# Altium PCB Main.PcbDoc (part 2 of 2)
Units mil, origin at the board's own origin, x right, y up, seen from the top; angles counter-clockwise.
Board outline 12846.15 x 9153.85 mil, 2 copper layers (TopLayer, BottomLayer); 186 components, 153 nets, 590 pads, 304 vias.
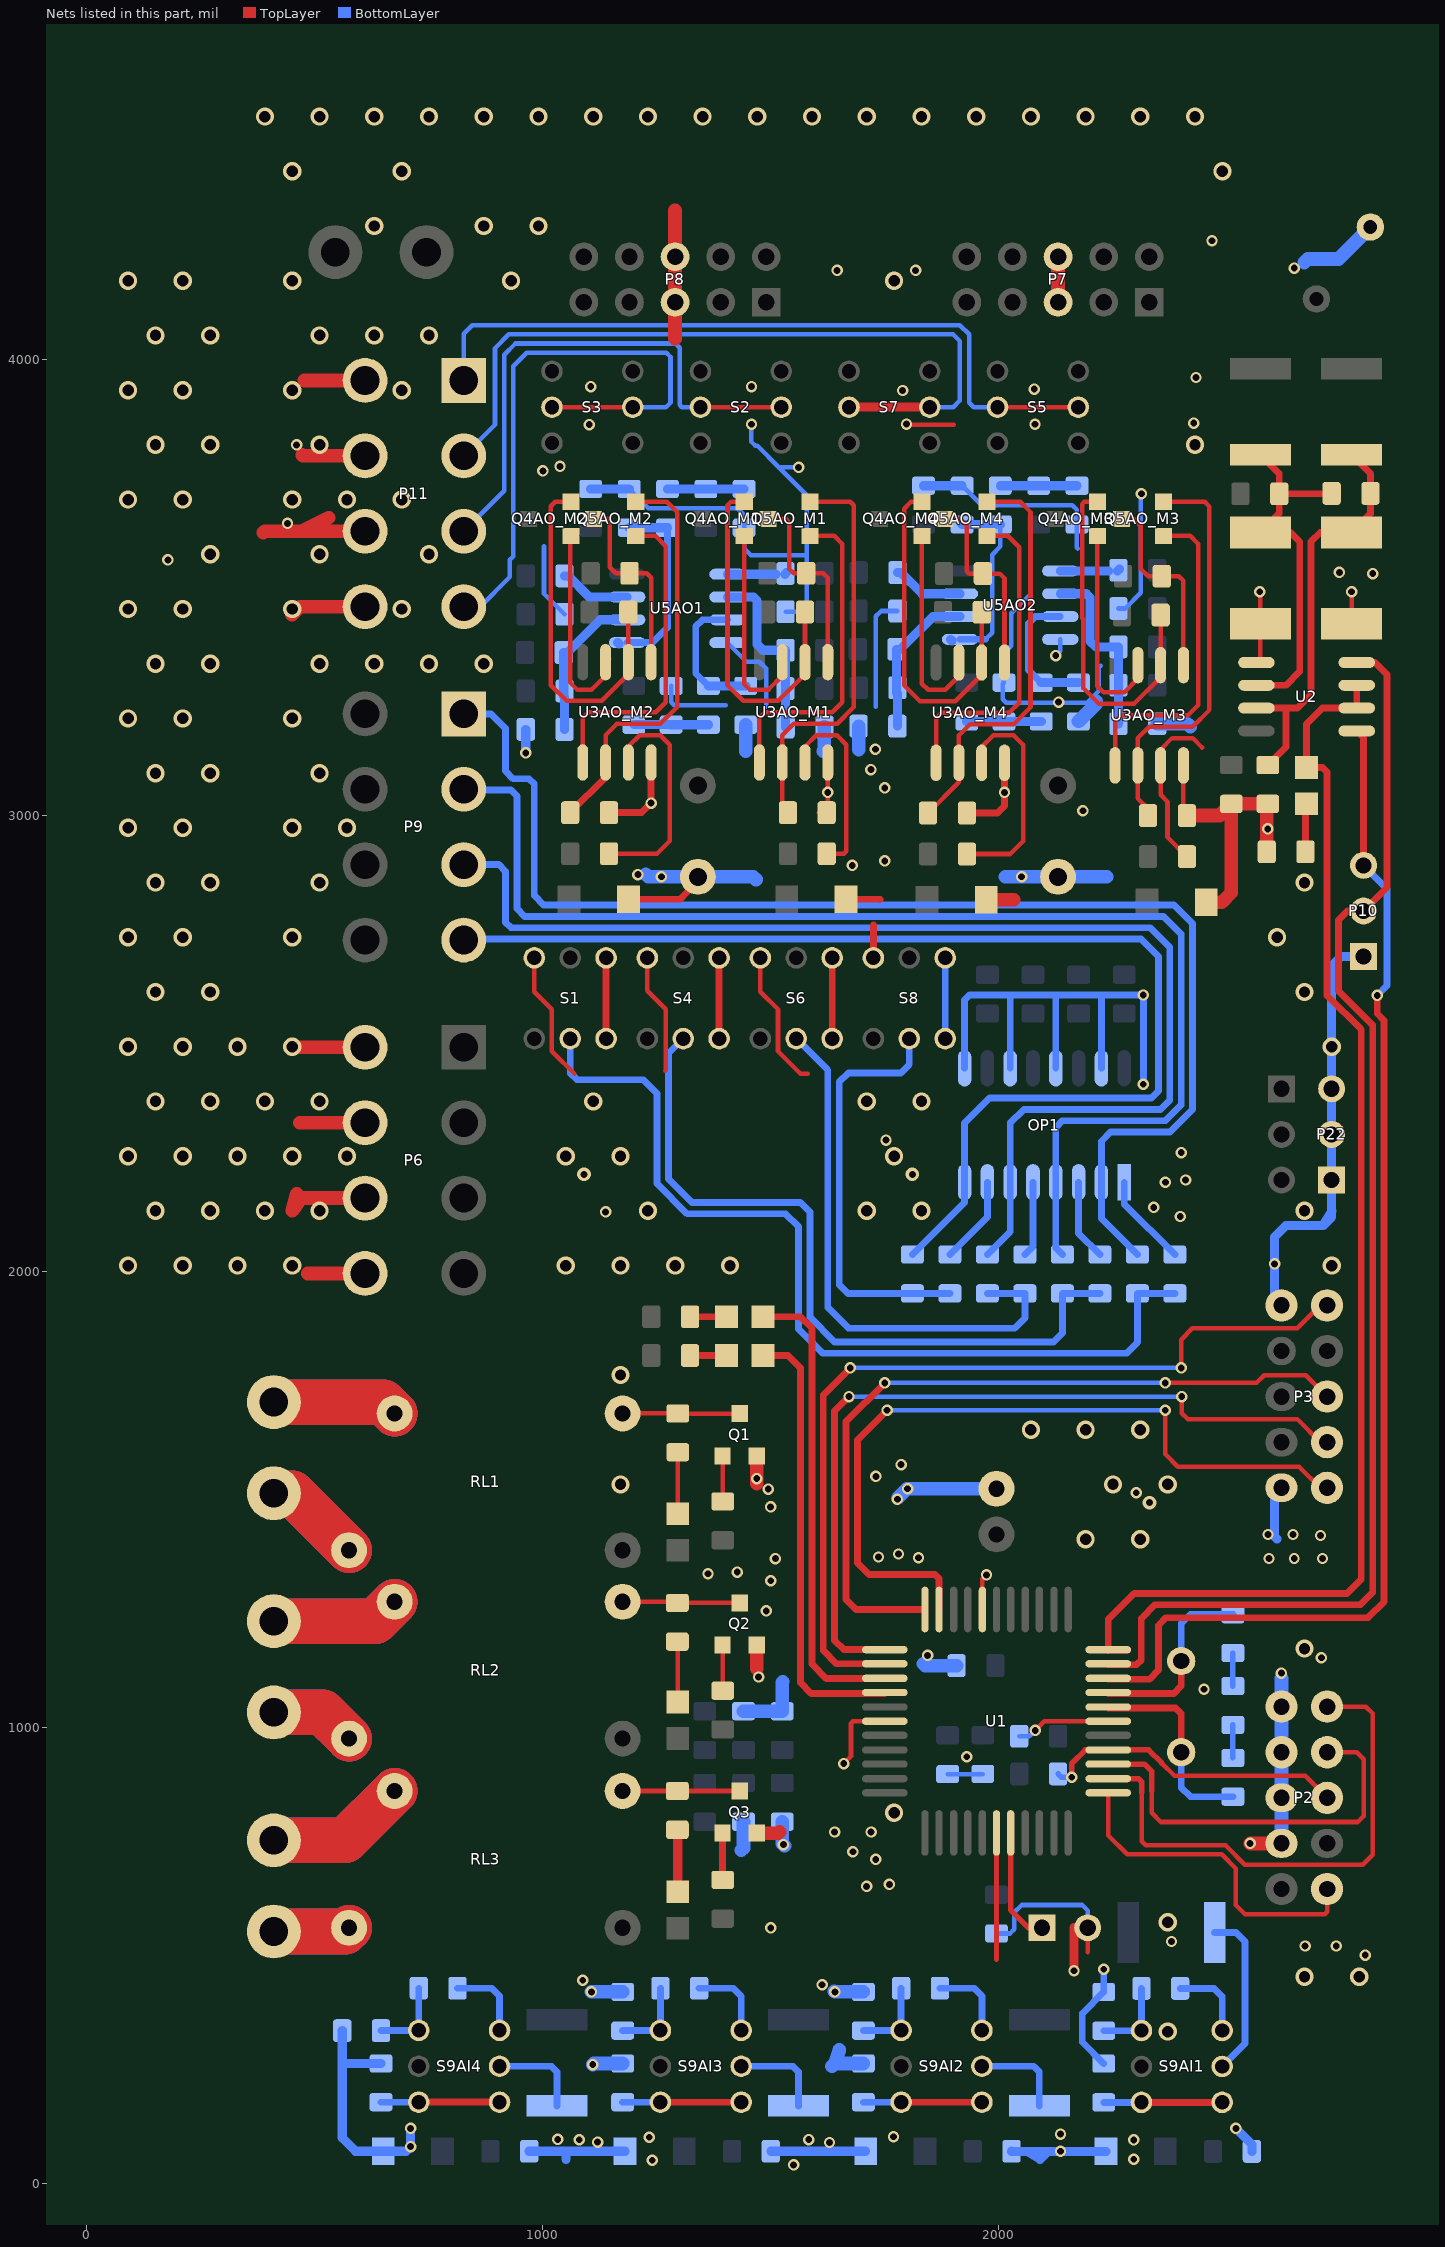
[diagram p2: the nets of this part, all layers, seen from the top]

## Via types
v1: diameter 25, hole 15, TopLayer to BottomLayer, tented both sides, 148 vias
v2: diameter 40, hole 25, TopLayer to BottomLayer, tented both sides, 133 vias
v3: diameter 30, hole 15, TopLayer to BottomLayer, tented both sides, 8 vias
v4: diameter 24, hole 15, TopLayer to BottomLayer, tented both sides, 6 vias
v5: diameter 35, hole 25, TopLayer to BottomLayer, tented both sides, 4 vias
v6: diameter 40, hole 24, TopLayer to BottomLayer, tented both sides, 3 vias
v7: diameter 30, hole 20, TopLayer to BottomLayer, tented both sides, 2 vias

## Nets (pads, with @x,y where several pads share a name; then routed paths per layer and width w, separated by ;. In a path a pad name is that pad's centre, name@x,y a point inside that pad or via, vN(x,y) a via of type N, cw(c..) or ccw(c..) an arc to the next point about the centre after c; other vN are vias at no path point) (continued)
GND: C1.2 C4.2 C5.1 C6.1 C7.1 C8.1 C9.2 C10.2 C11.2 C12AI1.2 C12AI2.2 C12AI3.2 C12AI4.2 C13AO_M1.2 C13AO_M2.2 C13AO_M3.2 C13AO_M4.2 C16AO1.1 C16AO2.1 C17AO1.2 C17AO2.2 C18AO1.1 C18AO2.1 C19AO1.1 C19AO2.1 C20AO1.2 C20AO2.2 C22AO1.2 C22AO2.2 C23AO1.2 C23AO2.2 C24AO1.2 C24AO2.2 D6.A D7.A DW1AI1.A DW1AI2.A DW1AI3.A DW1AI4.A OP1.9 OP1.11 OP1.13 OP1.15 P2.4 P2.6 P2.8 P2.10 P3.2 P3.10 P6.2 P6.4 P6.6 P6.8 P7.5 P7.6 P8.5 P8.6 P10.1 P11.2 P11.4 P11.6 P11.8 P20.2 P22.1 P22.2 P22.3 pad.0 Q1.3 Q2.3 Q3.3 R4.1 R13.1 R23.1 R27.1 R32AI1.2 R32AI2.2 R32AI3.2 R32AI4.2 R33AI1.2 R33AI2.2 R33AI3.2 R33AI4.2 R37AO_M1.1 R37AO_M2.1 R37AO_M3.1 R37AO_M4.1 R42AO1.2 R42AO2.2 R47AO1.2 R47AO2.2 S1.3 S4.3 S6.3 S8.3 U1.6 U1.18 U1.28 U1.39 U2.5 U3AO_M1.4 U3AO_M2.4 U3AO_M3.4 U3AO_M4.4 U5AO1.4 U5AO2.4 | length 15342.4
  TopLayer w10: S1.3@981.26,2687.17 981.26,2612.91 1019.88,2574.29 1019.88,2482.13 1069.3,2432.71 ; S4.3@1229.17,2687.17 1229.17,2614.71 1269.29,2574.6 1269.29,2440.87 1268.42,2440 ; S6.3@1477.09,2687.17 1477.09,2612.91 1515.71,2574.29 1515.71,2482.13 1565.13,2432.71 1580.81,2432.71 ; R37AO_M1.1@1605.25,3005.71 1625,3025.46 U3AO_M1.4@1625,3115.71 ; v1(1660,920) 1675.86,935.86 1675.86,1008.86 1680,1013 U1.28@1750,1013 ; v1@1797.5,3856.38 1901.17,3856.38 ; U1.18@1964,1258 1964,1325 v1(1973,1334) ; 1995,490 U1.39@1995,768 ; v1(2080,993) 2100,1013 U1.6@2240,1013 ; 2195,506.17 P20.2@2195,560 ; R37AO_M3.1@2405,3018.08 U3AO_M3.4@2405,3109.29 ; U2.5@2565,3335 2573.74,3343.74 D7.A@2573.74,3420 2573.74,3488.7 v1(2572.44,3490) ; D6.A@2773.74,3420 v1(2773.74,3490)
  TopLayer w15: R37AO_M2.1@1145.04,3005.71 1216.74,3005.71 v1(1237.54,3026.5) U3AO_M2.4@1237.54,3115.71 ; C13AO_M2.2@1187.54,2815.71 1300.71,2815.71 1315,2830 ; C13AO_M1.2@1665,2815.71 1739.29,2815.71 1740,2815 ; S8.3@1725,2687.17 1725,2759.29 ; R37AO_M4.1@1930,3005 1997.5,3005 2012.5,3020 v1(2012.5,3050) U3AO_M4.4@2012.5,3115
  TopLayer w20: v1(2165,465.69) 2165,560
  TopLayer w30: 386.95,3620 389.83,3622.88 P11.6@610,3622.88 ; v2@450,2491.06 P6.2@610,2491.06 ; v2@450,3440 467.53,3457.53 P11.8@610,3457.53 ; 466.61,2325.71 P6.4@610,2325.71 ; 470.79,3622.88 530.38,3652.35 ; 472.17,3790 473.94,3788.23 P11.4@610,3788.23 ; 476.52,3953.59 P11.2@610,3953.59 ; 485,1995 P6.8@610,1995 ; P6.6@610,2160.35 469.65,2160.35 ; 1290,4326.72 P8.6@1290,4225 P8.5@1290,4125 1290,4045.38 1290.38,4044.99 ; Q3.3@1469.19,767.48 1516.46,767.48 1518.98,770 ; 1469.19,1128.69 Q2.3@1469.19,1179.98 ; v1@1469.19,1534.19 Q1.3@1469.19,1595 ; C13AO_M4.2@1973.91,2815 2032.5,2815 ; P7.5@2130,4125 P7.6@2130,4225 ; R37AO_M3.1@2412.5,2999.29 2484.29,2999.29 C11.2@2510,3025 ; C13AO_M3.2@2455,2809.29 2489.29,2809.29 2510,2830 C11.2@2510,3025 ; v1(2551.19,745) P2.4@2620,745 ; R27.1@2587.5,2920 2587.5,3022.5 2585,3025 C11.2@2510,3025 ; 450.38,2132.35 469.65,2160.35 ; 450.38,2132.35 460,2170 469.65,2160.35 ; 450.38,2132.35 469.65,2160.35 ; 450.38,2132.35 470.79,2160.35 450.38,2132.35
  BottomLayer w10: 1002.54,3590 1002.54,3485.82 C22AO1.2@1047.54,3440.82 ; C23AO1.2@1189.55,3715.57 1231.64,3673.48 1426.52,3673.48 1441.42,3658.58 C24AO1.2@1441.42,3630.57 1441.42,3585 1456.42,3570 1509.34,3570 1509.69,3570.35 1576.75,3570.35 1578.75,3568.35 ; C16AO1.1@1281.3,3283.67 1281.3,3247.6 1288.05,3240.86 1401.06,3240.86 ; U5AO1.4@1404.91,3378.67 1446.59,3336.98 1474.83,3336.98 1490,3321.81 1490,3238.42 ; v1(1457.54,3857.37) 1457.54,3818.72 1466.26,3810 1470.71,3810 1517.18,3763.53 ; C17AO1.2@1532.39,3446.26 1566.12,3446.26 1578.75,3458.89 1578.75,3568.35 ; v1(1560.86,3762.94) 1560.27,3763.53 1517.18,3763.53 ; 1730.38,3238.42 1730.38,3436.3 1742.06,3447.98 C22AO2.2@1777.54,3447.98 ; C5.1@1887.74,897 C6.1@1964.5,897 ; C23AO2.2@1919.55,3722.72 1962.27,3680 2161.42,3680 2171.42,3670 C24AO2.2@2171.42,3637.72 2171.42,3586.71 2173.12,3585 ; C9.2@1995,547.5 2024.68,547.5 2034.22,557.04 2034.22,594.22 2050,610 2182.78,610 2195,597.78 P20.2@2195,560 ; C8.1@2045,980 2067,980 v1(2080,993) ; 2069.5,3530 2069.5,3485.11 2027.68,3443.29 2027.68,3372.05 2011.3,3355.67 C16AO2.1@2011.3,3290.82 2008.84,3288.36 2008.84,3254.53 2016.7,3246.66 2193.47,3246.66 2219.26,3272.46 2219.26,3324.16 2223.21,3328.11 ; v1(2125,3350) 2134.91,3359.9 U5AO2.4@2134.91,3385.82 ; C17AO2.2@2262.39,3453.41 2277.12,3453.41 2311.71,3488 2311.71,3703.88 v1(2312.83,3705) ; 1517.18,3763.53 1578.75,3701.96 1578.75,3568.35
  BottomLayer w15: OP1.9@1925,2445 1925,2595 1935.83,2605.83 v1(2316.92,2605.83) ; OP1.11@2025,2445 2025,2600 ; OP1.13@2125,2445 2125,2604.45 ; OP1.15@2225,2445 2225,2600.83 ; R33AI1.2@2230,262.12 2183.18,308.94 2183.18,372.18 R32AI1.2@2230,419 v1(2230,469.2) ; v1(2316.92,2410) 2317.5,2410.58 v1@2317.5,2605.25
  BottomLayer w20: R32AI4.2@560,334.38 560,99.47 589.47,70 DW1AI4.A@650,70 700,70 v1(710,80) v1(710,119.99) ; 561.7,262.5 R33AI4.2@645,262.5 ; v1(962.53,3136.69) R47AO1.2@962.53,3188.28 ; C12AI4.2@970.01,69.99 DW1AI3.A@1180,69.99 ; 1050,69.99 1050.38,52.35 ; C19AO1.1@1104.91,3715.57 C23AO1.2@1189.55,3715.57 ; C12AI3.2@1500,69.99 DW1AI2.A@1707.98,69.99 ; C19AO2.1@1834.91,3722.72 C23AO2.2@1919.55,3722.72 ; C12AI2.2@2027.98,69.99 2028.35,69.62 DW1AI1.A@2235,69.62 ; 2062.89,69.62 2090.38,52.35 2107.99,69.62 ; v1(2520,120) 2555,85 C12AI1.2@2555,69.62 ; P3.2@2605,1525 2605,1417.73 2610.38,1412.35 ; P3.10@2605,1925 v1(2605,2016.06) 2605,2075.24 2629.76,2100 2711.46,2100 ; 2730.38,2132.35 2711.46,2100 ; P10.1@2800,2690 2750,2690 2730,2670 P22.3@2730,2400 P22.2@2730,2300 P22.1@2730,2200 2730,2118.54 2711.46,2100
  BottomLayer w30: v1(1106.53,419.37) R32AI3.2@1175,419.37 ; v1(1109.6,260) 1112.09,262.49 R33AI3.2@1175,262.49 ; 1225.98,2870 1230.98,2865 1461.57,2865 1467.68,2858.89 ; 1435,730 1440,735 C1.2@1440,792.5 ; C4.2@1440,1035 R13.1@1525,1035 1525,1097.99 1526.5,1099.48 ; 1444.91,3140.1 C18AO1.1@1444.91,3198.67 ; R4.1@1525,792.5 1525,745 v1@1530,740 ; 1615,3140 1617.49,3142.49 R42AO1.2@1617.49,3193.62 ; 1634.36,256.26 1640.59,262.49 ; v1@1638.81,421 v1(1640.43,419.37) R32AI2.2@1702.98,419.37 ; 1692.53,3144.35 R47AO2.2@1692.53,3195.43 ; R33AI2.2@1702.98,262.49 1640.59,262.49 ; v1@1780,1504.07 1798.76,1522.84 C10.2@1995,1522.84 ; 1834.91,1139.03 1838.94,1135 C7.1@1907.5,1135 ; 2014.82,2865 C20AO1.2@2130,2865 2236.58,2865 ; C18AO2.1@2174.91,3205.82 2213.93,3244.85 2213.93,3250 ; R42AO2.2@2347.49,3200.77 2413.52,3200.77 2420,3194.29 ; P2.4@2620,745 P2.6@2620,845 P2.8@2620,945 P2.10@2620,1045 v1@2620,1106.93 ; 2670,4212.35 2677.65,4220 2745,4220 pad.0@2815,4290 ; 1640.59,262.49 1650.38,292.35 1640.59,262.49
  other v1: 1550,40 1240,50 2296,52.35 2135.4,70 1628.61,89 1120.06,90 1032.61,95.78 1079.91,95.23 1583.31,95.4 2296,94.86 1233.51,100.52 1768.99,101.73 2135.4,107.54 1612.54,435 1087.54,445 2803.72,500 2671.84,520 2740,520 2378.75,530 1500,559.72 1710,650.66 1760,655.21 1730,710 1680,726.58 1527.5,742.5 1640,770 1720,770 1929.55,935.04 2450,1083.18 1473.1,1110 2619.77,1118.48 2707.54,1152.26 1843.87,1157.48 1490,1255 1500,1321.24 1362.27,1336.49 1426.5,1340 1510,1369.78 1823.88,1371.49 1736.13,1373.29 1780,1379.78 1499.43,1483.15 1777.5,1500 2301.57,1514.07 1494.38,1522.11 1800,1522.84 1469.19,1545 1730.38,1550 1785.82,1575.89 2397.83,2120 1137.54,2130 2340,2140 2365.36,2195 2409.73,2200 2400,2260 1752.54,2287.61 1260,2865 2050,2865 1208.5,2869.78 1678.53,2889.9 1750,2900 2590,2970 2184.37,3010 1625,3050 1750,3060 1719.5,3100 1729.35,3144.59 2131.06,3248.01 2820,3530 2746.9,3532.5 177.54,3560 440,3640 1000,3755.18 1037.54,3765.18 460,3812.35 1101.78,3856.7 1797.5,3857.78 2079.44,3857.37 2427.54,3860 1789.07,3931.59 2077.81,3934.48 1104.91,3940 1457.54,3940 2432.54,3960 1645.35,4195 1817.48,4195.1 2647.92,4200 2467.54,4260
  other v2: 2370.38,332.35 2670.38,452.35 2790.38,452.35 2370.38,572.35 1770.38,812.35 2670.38,1172.35 2190.38,1412.35 2310.38,1412.35 1170.38,1532.35 2250.38,1532.35 2370.38,1532.35 2070.38,1652.35 2190.38,1652.35 2310.38,1652.35 1170.38,1772.35 90.38,2012.35 210.38,2012.35 330.38,2012.35 450.38,2012.35 1050.38,2012.35 1170.38,2012.35 1290.38,2012.35 1410.38,2012.35 2730.38,2012.35 150.38,2132.35 270.38,2132.35 390.38,2132.35 510.38,2132.35 1230.38,2132.35 1710.38,2132.35 1830.38,2132.35 2670.38,2132.35 90.38,2252.35 210.38,2252.35 330.38,2252.35 450.38,2252.35 570.38,2252.35 1050.38,2252.35 1170.38,2252.35 1770.38,2252.35 150.38,2372.35 270.38,2372.35 390.38,2372.35 510.38,2372.35 1110.38,2372.35 1710.38,2372.35 1830.38,2372.35 90.38,2492.35 210.38,2492.35 330.38,2492.35 450.38,2492.35 2730.38,2492.35 150.38,2612.35 270.38,2612.35 2670.38,2612.35 90.38,2732.35 210.38,2732.35 450.38,2732.35 2610.38,2732.35 150.38,2852.35 270.38,2852.35 510.38,2852.35 2670.38,2852.35 90.38,2972.35 210.38,2972.35 450.38,2972.35 570.38,2972.35 150.38,3092.35 270.38,3092.35 510.38,3092.35 90.38,3212.35 210.38,3212.35 450.38,3212.35 150.38,3332.35 270.38,3332.35 510.38,3332.35 630.38,3332.35 750.38,3332.35 870.38,3332.35 90.38,3452.35 210.38,3452.35 450.38,3452.35 690.38,3452.35 270.38,3572.35 510.38,3572.35 750.38,3572.35 90.38,3692.35 210.38,3692.35 450.38,3692.35 570.38,3692.35 690.38,3692.35 150.38,3812.35 270.38,3812.35 510.38,3812.35 2430.38,3812.35 90.38,3932.35 210.38,3932.35 450.38,3932.35 690.38,3932.35 150.38,4052.35 270.38,4052.35 510.38,4052.35 630.38,4052.35 750.38,4052.35 90.38,4172.35 210.38,4172.35 450.38,4172.35 930.38,4172.35 1770.38,4172.35 630.38,4292.35 870.38,4292.35 990.38,4292.35 450.38,4412.35 690.38,4412.35 2490.38,4412.35 390.38,4532.35 510.38,4532.35 630.38,4532.35 750.38,4532.35 870.38,4532.35 990.38,4532.35 1110.38,4532.35 1230.38,4532.35 1350.38,4532.35 1470.38,4532.35 1590.38,4532.35 1710.38,4532.35 1830.38,4532.35 1950.38,4532.35 2070.38,4532.35 2190.38,4532.35 2310.38,4532.35 2430.38,4532.35
  other v3: 2330.38,1492.35 1090.38,2212.35 1810.38,2212.35
  other v4: 2592.56,1370 2647.92,1370 2710,1370 2705.53,1420 2590.07,1422.84 2644.98,1422.84
MISO: P2.9 U1.2 | length 1159.4
  TopLayer w10: 2313.5,857 2313.5,749.99 2322.49,741 2497.28,741 2539.78,698.5 2798.5,698.5 2820,720 2820,1030 2805,1045 P2.9@2720,1045
  TopLayer w12: U1.2@2240,887 2306.5,887 2313.5,880 2313.5,857
MOSI: P2.1 U1.1 | length 764.3
  TopLayer w10: U1.1@2240,856 2240,762.5 2281.5,721 2489,721 2520,690 2520,610 2540,590 2715,590 2720,595 P2.1@2720,645
  TopLayer w12: U1.1@2240,856 U1.1@2260.39,856
NetC2_1: C2.1 U1.7 Y1.2 | length 449.3
  TopLayer w15: U1.7@2240,1042 2388,1042 2400,1030 Y1.2@2400,945
  BottomLayer w15: Y1.2@2400,945 2400,867.5 2420,847.5 C2.1@2513.5,847.5
NetC2_2: C2.2 R7.1 | length 72.5
  BottomLayer w12: C2.2@2513.5,932.5 R7.1@2513.5,1005
NetC3_1: C3.1 U1.8 Y1.1 | length 425.9
  TopLayer w15: U1.8@2240,1074 2384,1074 2400,1090 Y1.1@2400,1145
  BottomLayer w15: Y1.1@2400,1145 2400,1227.5 2420,1247.5 C3.1@2513.5,1247.5
NetC3_2: C3.2 R7.2 | length 72.5
  BottomLayer w12: R7.2@2513.5,1090 C3.2@2513.5,1162.5
NetC15AO1_1: C15AO1.1 R42AO1.1 R43AO1.2 U5AO1.2 | length 400.3
  BottomLayer w20: U5AO1.2@1404.91,3478.67 1461.78,3478.67 1469.91,3470.55 1469.91,3374.89 1482.81,3361.98 C15AO1.1@1532.39,3361.98 R43AO1.2@1532.39,3277.8 ; R43AO1.2@1532.34,3277.75 R43AO1.2@1532.39,3277.8 ; R42AO1.1@1532.49,3193.62 1532.49,3277.7 R43AO1.2@1532.39,3277.8
NetC15AO2_1: C15AO2.1 R42AO2.1 R43AO2.2 U5AO2.2 | length 400.3
  BottomLayer w20: U5AO2.2@2134.91,3485.82 2191.78,3485.82 2199.91,3477.7 2199.91,3382.04 2212.81,3369.14 C15AO2.1@2262.39,3369.14 R43AO2.2@2262.39,3284.95 ; R43AO2.2@2262.39,3284.95 R43AO2.2@2262.39,3284.95 ; R42AO2.1@2262.49,3200.77 2262.49,3284.85 R43AO2.2@2262.39,3284.95
NetC16AO1_2: C16AO1.2 R45AO1.1 R46AO1.2 | length 163.6
  BottomLayer w20: R45AO1.1@1199.55,3198.67 C16AO1.2@1281.3,3198.67 1281.41,3198.57 R46AO1.2@1363.06,3198.57
NetC16AO2_2: C16AO2.2 R45AO2.1 R46AO2.2 | length 163.6
  BottomLayer w20: R45AO2.1@1929.55,3205.82 C16AO2.2@2011.3,3205.82 2011.41,3205.72 R46AO2.2@2093.06,3205.72
NetC18AO1_2: C18AO1.2 R46AO1.1 U5AO1.3 | length 299.6
  BottomLayer w15: R46AO1.1@1363.06,3283.57 1335.22,3311.41 1335.22,3413.89 1350,3428.67 U5AO1.3@1404.91,3428.67
  BottomLayer w20: R46AO1.1@1363.06,3283.57 1444.8,3283.57 C18AO1.2@1444.91,3283.67
NetC18AO2_2: C18AO2.2 R46AO2.1 U5AO2.3 | length 299.6
  BottomLayer w15: R46AO2.1@2093.06,3290.72 2065.22,3318.56 2065.22,3421.04 2080,3435.82 U5AO2.3@2134.91,3435.82
  BottomLayer w20: R46AO2.1@2093.06,3290.72 2174.8,3290.72 C18AO2.2@2174.91,3290.82
NetC21AO1_1: C21AO1.1 R47AO1.1 R48AO1.2 U5AO1.6 | length 337.9
  BottomLayer w20: R47AO1.1@1047.54,3188.28 1047.54,3259.61 1045.89,3261.25 C21AO1.1@1045.89,3356.74 1053.91,3356.74 1125.85,3428.67 U5AO1.6@1184.91,3428.67
NetC21AO2_1: C21AO2.1 R47AO2.1 R48AO2.2 U5AO2.6 | length 337.9
  BottomLayer w20: R47AO2.1@1777.53,3195.43 1777.53,3266.77 1775.89,3268.41 C21AO2.1@1775.89,3363.89 1783.91,3363.89 1855.85,3435.82 U5AO2.6@1914.91,3435.82
NetC23AO1_1: C23AO1.1 R51AO1.1 U5AO1.5 | length 409.4
  BottomLayer w15: U5AO1.5@1184.91,3378.67 1240.74,3378.67 1273.44,3411.37 R51AO1.1@1273.44,3630.57
  BottomLayer w20: U5AO1.5@1164.41,3378.67 U5AO1.5@1167.42,3375.65 ; C23AO1.1@1189.55,3630.57 R51AO1.1@1273.44,3630.57
NetC23AO2_1: C23AO2.1 R51AO2.1 U5AO2.5 | length 465.3
  BottomLayer w10: U5AO2.5@1914.91,3385.82 1970.74,3385.82 1985.32,3400.4 1985.32,3571.4 2003.44,3589.52 R51AO2.1@2003.44,3637.72
  BottomLayer w15: U5AO2.5@1914.91,3385.82 1970.74,3385.82
  BottomLayer w20: U5AO2.5@1894.41,3385.82 U5AO2.5@1897.42,3382.8 ; C23AO2.1@1919.55,3637.72 R51AO2.1@2003.44,3637.72
NetC24AO1_1: C24AO1.1 R50AO1.1 R51AO1.2 | length 168.1
  BottomLayer w20: R51AO1.2@1273.44,3715.57 1273.55,3715.46 R50AO1.1@1357.43,3715.46 1357.53,3715.57 C24AO1.1@1441.42,3715.57
NetC24AO2_1: C24AO2.1 R50AO2.1 R51AO2.2 | length 168.1
  BottomLayer w20: R51AO2.2@2003.44,3722.72 2003.55,3722.61 R50AO2.1@2087.43,3722.61 2087.53,3722.72 C24AO2.1@2171.42,3722.72
NetD1_2: D1.2 R1.1 | length 135
  TopLayer w10: D1.2@1296,1468 R1.1@1296,1603
NetD2_2: D2.2 R6.1 | length 132.9
  TopLayer w10: R6.1@1295,1187.5 1296,1186.5 D2.2@1296,1055
NetD3_1: D3.1 R10.2 | length 80
  TopLayer w15: R10.2@1322.83,1815 D3.1@1402.83,1815
NetD3_2: D3.2 U1.26 | length 978.5
  TopLayer w15: D3.2@1482.83,1815 1537.83,1815 1565,1787.83 1565,1097.5 1588.5,1074 U1.26@1750,1074
NetD4_2: D4.2 R11.1 | length 136.6
  TopLayer w20: R11.1@1295,775 1296,774 D4.2@1296,638.84
NetD5_1: D5.1 R12.2 | length 80
  TopLayer w15: R12.2@1322.83,1900 D5.1@1402.83,1900
NetD5_2: D5.2 U1.25 | length 1027.1
  TopLayer w15: D5.2@1482.83,1900 1565,1900 1590,1875 1590,1138.39 1621.39,1107 U1.25@1750,1107
NetD6_K: D6.K F1.2 R21.2 R23.2 U2.7 | length 910.7
  TopLayer w15: U2.7@2565,3235 2630,3235 ; R23.2@2590,3110 2630,3150 2630,3235 ; F1.2@2773.74,3790.51 2815,3749.25 R21.2@2815,3705.88 2815,3661.26 D6.K@2773.74,3620 2705,3620 2685,3600 2685,3265 2655,3235 2630,3235
NetD7_K: D7.K F2.2 R20.1 R21.1 U2.6 | length 772
  TopLayer w15: U2.6@2565,3285 2630,3285 2660,3315 2660,3600 2640,3620 D7.K@2573.74,3620 2615,3661.26 R20.1@2615,3705 2615,3749.25 F2.2@2573.74,3790.51 ; 2635,3705 R21.1@2714.12,3705 ; R21.1@2729.12,3705 R21.1@2730,3705.88
NetD8_2: D8.2 R27.2 | length 109.6
  TopLayer w15: R27.2@2672.5,2920 2672.5,3022.5 D8.2@2675,3025 ; D8.2@2685,3025 D8.2@2687.5,3022.5
NetF3AI1_2: F3AI1.2 S9AI1.1 | length 369.9
  BottomLayer w15: F3AI1.2@2473.24,550 2520,550 2540,530 2540,305.88 S9AI1.1@2490,255.88
NetF3AI2_2: F3AI2.2 S9AI2.1 | length 205.7
  BottomLayer w15: S9AI2.1@1962.98,256.25 2076.72,256.25 2088.84,244.13 F3AI2.2@2088.84,169.32
NetF3AI3_2: F3AI3.2 S9AI3.1 | length 205.7
  BottomLayer w15: S9AI3.1@1435,256.25 1548.74,256.25 1560.86,244.13 F3AI3.2@1560.86,169.32
NetF3AI4_2: F3AI4.2 S9AI4.1 | length 205.7
  BottomLayer w15: S9AI4.1@905,256.26 1018.74,256.26 1030.86,244.14 F3AI4.2@1030.86,169.33
NetOP1_1: OP1.1 R16.2 | length 204.7
  BottomLayer w15: OP1.1@2275,2195 2275,2147.68 R16.2@2386.29,2036.39
NetOP1_3: OP1.3 R19.2 | length 178
  BottomLayer w15: OP1.3@2175,2195 2175,2083.16 R19.2@2221.78,2036.39
NetOP1_5: OP1.5 R25.2 | length 166
  BottomLayer w15: R25.2@2057.26,2036.39 2075,2054.13 OP1.5@2075,2195
NetOP1_7: OP1.7 R29.2 | length 192.7
  BottomLayer w15: R29.2@1892.74,2036.39 1975,2118.64 OP1.7@1975,2195
NetP1_1: P1.1 RL1.4 | length 550.7
  TopLayer w100: P1.1@410,1713 650,1713 RL1.4@675,1688
  BottomLayer w100: P1.1@410,1713 650,1713 RL1.4@675,1688
NetP1_2: P1.2 RL1.3 | length 433.5
  TopLayer w100: P1.2@410,1513 450,1513 RL1.3@575,1388
  BottomLayer w100: P1.2@410,1513 450,1513 RL1.3@575,1388
NetP4_1: P4.1 RL2.4 | length 565.3
  TopLayer w100: P4.1@410,1232.44 632.44,1232.44 RL2.4@675,1275
  BottomLayer w100: P4.1@410,1232.44 632.44,1232.44 RL2.4@675,1275
NetP4_2: P4.2 RL2.3 | length 377.6
  TopLayer w100: P4.2@410,1032.44 517.56,1032.44 RL2.3@575,975
  BottomLayer w100: P4.2@410,1032.44 517.56,1032.44 RL2.3@575,975
NetP5_1: P5.1 RL3.4 | length 619.6
  TopLayer w100: P5.1@409.98,751.84 566.84,751.84 RL3.4@675,860
  BottomLayer w100: P5.1@409.98,751.84 566.84,751.84 RL3.4@675,860
NetP5_2: P5.2 RL3.3 | length 336.8
  TopLayer w100: P5.2@409.98,551.84 566.84,551.84 RL3.3@575,560
  BottomLayer w100: P5.2@409.98,551.84 566.84,551.84 RL3.3@575,560
NetQ1_1: Q1.1 R1.2 RL1.2 | length 257
  TopLayer w10: RL1.2@1175,1688 R1.2@1296,1688 1296.48,1687.52 Q1.1@1431.79,1687.52
NetQ1_2: Q1.2 R3.1 | length 100
  TopLayer w10: R3.1@1394.38,1495 Q1.2@1394.38,1595
NetQ2_1: Q2.1 R6.2 RL2.2 | length 257.8
  TopLayer w10: RL2.2@1175,1275 1292.5,1275 R6.2@1295,1272.5 Q2.1@1431.79,1272.5
NetQ2_2: Q2.2 R8.1 | length 100
  TopLayer w10: R8.1@1394.38,1080 Q2.2@1394.38,1179.98
NetQ3_1: Q3.1 R11.2 RL3.2 | length 256.8
  TopLayer w10: RL3.2@1175,860 R11.2@1295,860 Q3.1@1431.79,860
NetQ3_2: Q3.2 R14.1 | length 102.5
  TopLayer w15: R14.1@1394.38,665 Q3.2@1394.38,767.48
NetQ4AO_M1_2: Q4AO_M1.2 U3AO_M1.7 | length 466.4
  TopLayer w10: Q4AO_M1.2@1441.69,3612.6 1441.69,3287.4 1453.38,3275.71 1495,3275.71 1525,3305.71 U3AO_M1.7@1525,3335.71 U3AO_M1.7@1532.5,3343.21
NetQ4AO_M1_3: Q4AO_M1.3 R34AO_M1.1 U3AO_M1.6 | length 779.3
  TopLayer w10: Q4AO_M1.3@1441.69,3687.4 1412.79,3687.4 1405,3679.62 1405,3285.36 1439.64,3250.71 1516.59,3250.71 1575,3309.12 R34AO_M1.1@1575,3445.71
NetQ4AO_M2_2: Q4AO_M2.2 U3AO_M2.7 | length 458.7
  TopLayer w10: Q4AO_M2.2@1061.26,3612.6 1060.54,3611.87 1060.54,3290.18 1075,3275.71 1107.54,3275.71 1137.54,3305.71 U3AO_M2.7@1137.54,3335.71 U3AO_M2.7@1145.04,3343.21
NetQ4AO_M2_3: Q4AO_M2.3 R34AO_M2.1 U3AO_M2.6 | length 785.1
  TopLayer w10: Q4AO_M2.3@1061.26,3687.4 1027.4,3687.4 1017.54,3677.54 1017.54,3285.36 1052.18,3250.71 1129.13,3250.71 1187.54,3309.12 U3AO_M2.6@1187.54,3335.71 R34AO_M2.1@1187.54,3445.71
NetQ4AO_M3_2: Q4AO_M3.2 U3AO_M3.7 | length 466.3
  TopLayer w10: Q4AO_M3.2@2216.26,3601.89 2216.26,3283.03 2230,3269.29 2275,3269.29 2305,3299.29 U3AO_M3.7@2305,3329.29 U3AO_M3.7@2312.5,3336.79
NetQ4AO_M3_3: Q4AO_M3.3 R34AO_M3.1 U3AO_M3.6 | length 785.3
  TopLayer w10: Q4AO_M3.3@2216.26,3687.4 2187.79,3687.4 2182.56,3682.17 2182.56,3432.44 2185,3430 2185,3278.93 2219.64,3244.29 2296.59,3244.29 2355,3302.7 U3AO_M3.6@2355,3329.29 R34AO_M3.1@2355,3439.29
NetQ4AO_M4_2: Q4AO_M4.2 U3AO_M4.7 | length 463.8
  TopLayer w10: Q4AO_M4.2@1831.26,3612.6 1831.26,3288.76 1845.02,3275 1882.5,3275 1912.5,3305 U3AO_M4.7@1912.5,3335 U3AO_M4.7@1920,3342.5
NetQ4AO_M4_3: Q4AO_M4.3 R34AO_M4.1 U3AO_M4.6 | length 777.9
  TopLayer w10: Q4AO_M4.3@1831.26,3687.4 1807.4,3687.4 1792.5,3672.5 1792.5,3284.64 1827.14,3250 1904.09,3250 1962.5,3308.41 R34AO_M4.1@1962.5,3445
NetQ5AO_M1_1: Q5AO_M1.1 R35AO_M1.1 U3AO_M1.5 | length 429.4
  TopLayer w10: Q5AO_M1.1@1493.74,3650 1532.5,3650 1540.83,3641.67 1540.83,3539.88 1550,3530.71 R35AO_M1.1@1577.5,3530.71 1615,3530.71 1625,3520.71 U3AO_M1.5@1625,3335.71
NetQ5AO_M1_2: Q5AO_M1.2 U3AO_M1.1 | length 719.1
  TopLayer w10: U3AO_M1.1@1475,3115.71 1475,3213.21 1487.5,3225.71 1635,3225.71 1657,3247.71 1657,3595 1639.4,3612.6 Q5AO_M1.2@1586.26,3612.6
NetQ5AO_M1_3: Q5AO_M1.3 R37AO_M1.2 U3AO_M1.2 | length 898.9
  TopLayer w10: R37AO_M1.2@1537.5,3005.71 1525,3018.21 U3AO_M1.2@1525,3115.71 1525,3175.71 1550,3200.71 1645.36,3200.71 1682,3237.36 1682,3679.62 1674.21,3687.4 Q5AO_M1.3@1586.26,3687.4
NetQ5AO_M2_1: Q5AO_M2.1 R35AO_M2.1 U3AO_M2.5 | length 426.9
  TopLayer w10: Q5AO_M2.1@1111.28,3650 1146.67,3650 1146.67,3544.04 1160,3530.71 1227.54,3530.71 1237.54,3520.71 U3AO_M2.5@1237.54,3335.71
NetQ5AO_M2_2: Q5AO_M2.2 U3AO_M2.1 | length 711.2
  TopLayer w10: U3AO_M2.1@1087.54,3115.71 1087.54,3213.21 1100.04,3225.71 1247.54,3225.71 1269.54,3247.71 1269.54,3590 1246.94,3612.6 Q5AO_M2.2@1203.79,3612.6
NetQ5AO_M2_3: Q5AO_M2.3 R37AO_M2.2 U3AO_M2.2 | length 912.3
  TopLayer w10: U3AO_M2.2@1137.54,3115.71 1137.54,3175.71 1162.54,3200.71 1257.89,3200.71 1294.54,3237.36 1294.54,3665 1272.13,3687.4 Q5AO_M2.3@1203.8,3687.4
  TopLayer w15: R37AO_M2.2@1060.04,3005.71 1137.54,3083.21 U3AO_M2.2@1137.54,3115.71
NetQ5AO_M3_1: Q5AO_M3.1 R35AO_M3.1 U3AO_M3.5 | length 436.5
  TopLayer w10: Q5AO_M3.1@2268.74,3650 2296.5,3650 2311.71,3634.79 2311.71,3540 2327.42,3524.29 R35AO_M3.1@2357.5,3524.29 ; R35AO_M3.1@2360,3526.79 R35AO_M3.1@2357.5,3524.29 ; U3AO_M3.5@2405,3329.29 2405,3514.29 2395,3524.29 R35AO_M3.1@2357.5,3524.29
NetQ5AO_M3_2: Q5AO_M3.2 U3AO_M3.1 | length 730.9
  TopLayer w10: U3AO_M3.1@2255,3109.29 2255,3206.79 2267.5,3219.29 2415,3219.29 2437,3241.29 2437,3595.6 2420,3612.6 Q5AO_M3.2@2361.26,3612.6
NetQ5AO_M3_3: Q5AO_M3.3 R37AO_M3.2 U3AO_M3.2 | length 912.8
  TopLayer w10: R37AO_M3.2@2327.5,2999.29 2327.5,3014.29 2305,3036.79 U3AO_M3.2@2305,3109.29 2305,3169.29 2330,3194.29 2425.36,3194.29 2462,3230.93 2462,3676.69 2451.29,3687.4 Q5AO_M3.3@2361.26,3687.4
NetQ5AO_M4_1: Q5AO_M4.1 R35AO_M4.1 U3AO_M4.5 | length 437
  TopLayer w10: Q5AO_M4.1@1876.24,3645 Q5AO_M4.1@1881.24,3645 ; Q5AO_M4.1@1881.24,3650 1914.55,3650 1929.55,3635 1929.55,3535.45 1935,3530 R35AO_M4.1@1965,3530 ; R35AO_M4.1@1967.5,3532.5 R35AO_M4.1@1965,3530 ; U3AO_M4.5@2012.5,3335 2012.5,3520 2002.5,3530 R35AO_M4.1@1965,3530
NetQ5AO_M4_2: Q5AO_M4.2 U3AO_M4.1 | length 725.4
  TopLayer w10: U3AO_M4.1@1862.5,3115 1862.5,3212.5 1875,3225 2022.5,3225 2044.5,3247 2044.5,3587.52 2019.42,3612.6 Q5AO_M4.2@1973.76,3612.6 ; Q5AO_M4.2@1963.76,3607.6 Q5AO_M4.2@1973.76,3607.6
NetQ5AO_M4_3: Q5AO_M4.3 R37AO_M4.2 U3AO_M4.2 | length 923.9
  TopLayer w10: R37AO_M4.2@1845,3005 1912.5,3072.5 U3AO_M4.2@1912.5,3115 1912.5,3175 1937.5,3200 2032.86,3200 2069.5,3236.64 2069.5,3665 2047.1,3687.4 Q5AO_M4.3@1973.76,3687.4 ; Q5AO_M4.3@1963.76,3682.4 Q5AO_M4.3@1973.76,3682.4
NetR16_1: R16.1 R17.1 S1.4 | length 2020.4
  BottomLayer w15: S1.4@1060,2510 1060,2435 1075,2420 1220,2420 1250,2390 1250,2192.56 1316.66,2125.9 1532.39,2125.9 1560.55,2097.74 1560.55,1873.49 1614.04,1820 2280,1820 2304.04,1844.04 R17.1@2304.04,1951.39 R16.1@2386.29,1951.39
NetR19_1: R19.1 R22.1 S4.4 | length 1645
  BottomLayer w15: S4.4@1307.91,2510 1275.93,2478.02 1275.93,2201.98 1327.01,2150.9 1564.65,2150.9 1585.55,2130 1585.55,1899.45 1640,1845 2120,1845 2139.52,1864.52 R22.1@2139.52,1951.39 R19.1@2221.78,1951.39
NetR25_1: R25.1 R26.1 S6.4 | length 1215.2
  BottomLayer w15: S6.4@1555.83,2510 1625,2440.83 1625,1920 1670,1875 2035,1875 2057.26,1897.26 R25.1@2057.26,1951.39 R26.1@1975,1951.39
NetR29_1: R29.1 R30.1 S8.4 | length 921.3
  BottomLayer w15: S8.4@1803.74,2510 1803.74,2453.74 1785,2435 1670,2435 1650,2415 1650,1970.36 1668.97,1951.39 R30.1@1810.48,1951.39 R29.1@1892.74,1951.39
NetR31AI1_1: R31AI1.1 S9AI1.2 | length 174.4
  BottomLayer w15: R31AI1.1@2397.83,427.12 2472.5,427.12 2490,409.62 S9AI1.2@2490,334.62
NetR31AI1_2: R31AI1.2 R32AI1.1 S9AI1.5 | length 175.6
  BottomLayer w15: R32AI1.1@2230,334 2312.22,334 S9AI1.5@2312.83,334.62 R31AI1.2@2312.83,427.12
NetR31AI2_1: R31AI2.1 S9AI2.2 | length 174.4
  BottomLayer w15: R31AI2.1@1870.82,427.49 1945.48,427.49 1962.98,409.99 S9AI2.2@1962.98,334.99
NetR31AI2_2: R31AI2.2 R32AI2.1 S9AI2.5 | length 175.6
  BottomLayer w15: R32AI2.1@1702.98,334.37 1785.2,334.37 S9AI2.5@1785.82,334.99 R31AI2.2@1785.82,427.49
NetR31AI3_1: R31AI3.1 S9AI3.2 | length 174.4
  BottomLayer w15: R31AI3.1@1342.83,427.49 1417.5,427.49 1435,409.99 S9AI3.2@1435,334.99
NetR31AI3_2: R31AI3.2 R32AI3.1 S9AI3.5 | length 175.6
  BottomLayer w15: R32AI3.1@1175,334.37 1257.22,334.37 S9AI3.5@1257.83,334.99 R31AI3.2@1257.83,427.49
NetR31AI4_1: R31AI4.1 S9AI4.2 | length 174.4
  BottomLayer w15: R31AI4.1@812.84,427.5 887.5,427.5 905,410 S9AI4.2@905,335
NetR31AI4_2: R31AI4.2 R32AI4.1 S9AI4.5 | length 175.6
  BottomLayer w15: R32AI4.1@645,334.38 727.22,334.38 S9AI4.5@727.84,335 R31AI4.2@727.84,427.5
NetR33AI1_1: R33AI1.1 S9AI1.3 S9AI1.6 | length 260
  TopLayer w15: S9AI1.6@2312.83,177.14 S9AI1.3@2490,177.14
  BottomLayer w15: R33AI1.1@2230,177.12 S9AI1.6@2312.83,177.14
NetR33AI2_1: R33AI2.1 S9AI2.3 S9AI2.6 | length 260
  TopLayer w15: S9AI2.6@1785.82,177.51 S9AI2.3@1962.98,177.51
  BottomLayer w15: R33AI2.1@1702.98,177.49 S9AI2.6@1785.8,177.49
NetR33AI3_1: R33AI3.1 S9AI3.3 S9AI3.6 | length 260
  TopLayer w15: S9AI3.6@1257.83,177.51 S9AI3.3@1435,177.51
  BottomLayer w15: R33AI3.1@1175,177.49 S9AI3.6@1257.81,177.49
NetR33AI4_1: R33AI4.1 S9AI4.3 S9AI4.6 | length 260
  TopLayer w15: S9AI4.6@727.84,177.52 S9AI4.3@905,177.52
  BottomLayer w15: R33AI4.1@645,177.5 S9AI4.6@727.82,177.5
NetR36AO_M1_1: R36AO_M1.1 U3AO_M1.3 | length 424.1
  TopLayer w10: U3AO_M1.3@1575,3115.71 1575,3150.71 1600,3175.71 1645,3175.71 1665.71,3155 1665.71,2920.93 1660.49,2915.71 R36AO_M1.1@1622.5,2915.71
NetR36AO_M2_1: R36AO_M2.1 U3AO_M2.3 | length 500.8
  TopLayer w10: R36AO_M2.1@1145.04,2915.71 1250.4,2915.71 1278.25,2943.56 1278.25,3155 1257.54,3175.71 1212.54,3175.71 1187.54,3150.71 U3AO_M2.3@1187.54,3115.71
NetR36AO_M3_1: R36AO_M3.1 U3AO_M3.3 | length 368.5
  TopLayer w10: R36AO_M3.1@2412.5,2909.29 2370,2951.79 2370,3030 2355,3045 U3AO_M3.3@2355,3109.29 2355,3144.29 2380,3169.29 2425,3169.29 2445.71,3148.58
NetR36AO_M4_1: R36AO_M4.1 U3AO_M4.3 | length 540.8
  TopLayer w10: R36AO_M4.1@1930,2915 2010,2915 ; 1960,2915 2025.36,2915 2053.21,2942.85 2053.21,3154.29 2032.5,3175 1987.5,3175 1962.5,3150 U3AO_M4.3@1962.5,3115
NetR44AO1_2: R44AO1.2 U5AO1.1 | length 111.5
  BottomLayer w20: U5AO1.1@1404.91,3528.67 1510.71,3528.67 ; R44AO1.2@1530.71,3528.67 R44AO1.2@1532.39,3530.35 R44AO1.2@1534.76,3532.72
NetR44AO2_2: R44AO2.2 U5AO2.1 | length 111.5
  BottomLayer w20: U5AO2.1@2134.91,3535.82 2240.71,3535.82 ; R44AO2.2@2260.71,3535.82 R44AO2.2@2262.39,3537.5 R44AO2.2@2264.76,3539.87
NetR49AO1_2: R49AO1.2 U5AO1.7 | length 156.5
  BottomLayer w20: R49AO1.2@1047.64,3525.01 1055.45,3525.01 1101.78,3478.67 U5AO1.7@1184.91,3478.67
NetR49AO2_2: R49AO2.2 U5AO2.7 | length 156.5
  BottomLayer w20: R49AO2.2@1777.64,3532.16 1785.45,3532.16 1831.78,3485.82 U5AO2.7@1914.91,3485.82
NetS1_2: S1.2 S1.5 | length 187.2
  TopLayer w15: S1.5@1138.74,2510 S1.2@1138.74,2687.17 S1.2@1138.74,2697.17
NetS4_2: S4.2 S4.5 | length 187.2
  TopLayer w15: S4.5@1386.65,2510 S4.2@1386.65,2687.17 S4.2@1386.65,2697.17
NetS6_2: S6.2 S6.5 | length 177.2
  TopLayer w15: S6.5@1634.57,2520 S6.2@1634.57,2697.17
NetS8_2: S8.2 S8.5 | length 177.2
  BottomLayer w15: S8.5@1882.48,2510 S8.2@1882.48,2687.17
R/TXD: D8.1 U1.11 U2.2 U2.3 | length 2823.4
  TopLayer w12: U1.11@2240,1168 U1.11@2283.5,1168
  TopLayer w15: U1.11@2240,1168 2240,1236.5 2297,1293.5 2763.5,1293.5 2795,1325 2795,2529.64 2720,2604.64 2720,3095 2710,3105 D8.1@2675,3105 2675,3200 2710,3235 U2.2@2785,3235 U2.3@2785,3285
RESET: P2.5 R5.1 U1.4 | length 679
  TopLayer w10: 2357.5,921.03 2385.37,893.16 2671.84,893.16 P2.5@2720,845
  TopLayer w12: v1(2160,890) 2160,920 2190,950 U1.4@2240,950 2328.53,950 2357.5,921.03
  BottomLayer w12: R5.1@2130,897.5 2137.5,890 v1(2160,890)
RXD: P10.3 U1.9 U2.1 | length 2686.1
  TopLayer w15: U1.9@2240,1105 2330,1105 2350.62,1125.62 2350.62,1134.38 ; 2350,1134.38 2350,1223.5 2366.5,1240 2810,1240 2845,1275 2845,2550.36 2830,2565.36 v1(2830,2605) ; U2.1@2785,3185 2800,3170 P10.3@2800,2890
  BottomLayer w15: P10.3@2800,2890 2851.52,2838.48 2851.52,2626.52 v1(2830,2605)
SCK: P2.7 U1.3 | length 882.5
  TopLayer w10: 2335.5,860 2335.5,811.99 2355.5,791.99 2786.99,791.99 2800,805 2800,930 2785,945 P2.7@2720,945
  TopLayer w12: U1.3@2240,919 2319.53,919 2335.5,903.03 2335.5,860
TCK: P3.1 U1.21 | length 1699.7
  TopLayer w10: v1(2365,1695) 2365,1599 2392.5,1571.5 2658.5,1571.5 P3.1@2705,1525
  TopLayer w15: v1(1755,1695) 1690,1630 1690,1360 1715,1335 1860,1335 1869,1326 U1.21@1869,1258
  BottomLayer w10: v1(1755,1695) v1(2365,1695)
TDI: P3.9 U1.24 | length 1915.4
  TopLayer w10: v1(2400,1787.83) 2400,1850 2424.57,1874.57 2654.57,1874.57 P3.9@2705,1925
  TopLayer w15: v1(1674.26,1787.83) 1615,1728.57 1615,1168 1644,1139 U1.24@1750,1139
  BottomLayer w10: v1(1674.26,1787.83) v1(2400,1787.83)
TDO: P3.3 U1.23 | length 1762.5
  TopLayer w10: v1(2401.25,1725) 2401.25,1688.75 2415,1675 2655,1675 P3.3@2705,1625
  TopLayer w15: v1(1671.43,1725) 1640,1693.58 1640,1190 1660,1170 U1.23@1750,1170
  BottomLayer w10: v1(1671.43,1725) v1(2401.25,1725)
TMS: P3.5 U1.22 | length 1682.2
  TopLayer w10: v1(2365,1755) 2565.31,1755 2581.8,1771.5 2673.5,1771.5 2705,1740 P3.5@2705,1725
  TopLayer w15: v1(1750,1755) 1665,1670 1665,1280 1687,1258 U1.22@1838,1258
  BottomLayer w10: v1(1750,1755) v1(2365,1755)
TXD: P10.2 U1.10 U2.4 | length 2885.4
  TopLayer w15: U1.10@2240,1137 2302,1137 2312.5,1147.5 2312.5,1238.5 2342.5,1268.5 2697,1268.5 2793.5,1268.5 2820,1295 2820,2540 2745,2615 2745,2770 2765,2790 P10.2@2800,2790 2851.52,2841.52 2851.52,3308.41 2824.92,3335 U2.4@2785,3335
V_DI1: OP1.2 P9.1 R17.2 | length 2905.9
  BottomLayer w15: P9.1@826.53,3222.33 886.49,3222.33 918.15,3190.66 918.15,3096.85 935,3080 970,3080 981.26,3068.74 981.26,2823.74 1001.71,2803.29 2384.54,2803.29 2425,2762.83 2425,2354.29 2375.71,2305 2245,2305 2225,2285 OP1.2@2225,2195 2225,2115.42 R17.2@2304.04,2036.39
V_DI2: OP1.4 P9.3 R22.2 | length 2804.8
  BottomLayer w15: P9.3@826.53,3056.97 828.5,3055 930,3055 943.15,3041.85 943.15,2795 959.86,2778.29 2361,2778.29 2400,2739.29 2400,2364.64 2365.36,2330 2139.52,2330 2125,2315.48 OP1.4@2125,2195 2125,2050.9 R22.2@2139.52,2036.39
V_DI3: OP1.6 P9.5 R26.2 | length 2704.4
  BottomLayer w15: P9.5@826.53,2891.62 903.38,2891.62 918.15,2876.85 918.15,2765.14 930,2753.29 2332.07,2753.29 2375,2710.36 2375,2375 2355,2355 2055,2355 2025,2325 OP1.6@2025,2195 2025,2086.39 R26.2@1975,2036.39
V_DI4: OP1.8 P9.7 R30.2 | length 2625.2
  BottomLayer w15: P9.7@826.53,2726.26 828.56,2728.29 2311.71,2728.29 2350,2690 2350,2395 2335,2380 1980,2380 1925,2325 OP1.8@1925,2195 1925,2150.9 R30.2@1810.48,2036.39
V_MA1: P11.5 S2.1 S2.4 | length 1172.6
  TopLayer w10: S2.4@1345.69,3895 S2.1@1522.85,3895
  BottomLayer w10: P11.5@826.53,3622.88 915,3711.35 915,4009.61 940,4034.61 1290.39,4034.61 1300,4025 1300,3900 1305,3895 S2.4@1345.69,3895
V_MA2: P11.7 S3.1 S3.4 | length 1326
  TopLayer w10: S3.4@1019.95,3895 S3.1@1197.11,3895
  BottomLayer w10: P11.7@826.53,3457.53 862.53,3457.53 927.64,3522.64 927.64,3560.06 935,3567.42 935,3985 964.61,4014.61 1270.39,4014.61 1280,4005 1280,3905 1270,3895 S3.1@1197.11,3895 ; S3.1@1197.11,3885 S3.1@1202.11,3890
V_MA3: P11.1 S5.1 S5.4 | length 1620.6
  TopLayer w10: S5.4@1997.16,3895 S5.1@2174.33,3895
  BottomLayer w10: P11.1@826.53,3953.59 826.53,4056.14 845.39,4075 964.61,4075 965,4074.61 965.39,4075 1914.55,4075 1935,4054.55 1935,3905 1945,3895 S5.4@1997.16,3895
V_MA4: P11.3 S7.1 S7.4 | length 1682.7
  TopLayer w20: S7.4@1671.43,3895 S7.1@1848.59,3895
  BottomLayer w10: P11.3@826.53,3788.23 895,3856.7 895,4024.61 925,4054.61 1234.61,4054.61 1235,4055 1899.55,4055 1914.55,4040 1914.55,3909.55 1900,3895 S7.1@1848.59,3895
备用: P20.1 U1.40 | length 224.2
  TopLayer w12: U1.40@2026,768 2026,599 2065,560
pads on no net: P2.3 P3.6 P3.8 P7.3 P7.4 P8.3 P8.4 U1.30 U1.31

## Polygon pours and split planes (outlines as drawn)
GND on TopLayer "GND" (solid, remove dead copper, pour order 10): 350,4610 2430,4610 cw(c2430,4510) 2530,4510 2530,4430 2530,4360 ccw(c2630,4360) 2630,4260 2750,4260 2810,4260 cw(c2810,4210) 2860,4210 2860,460 cw(c2790,460) 2790,390 2600,390 ccw(c2600,330) 2540,330 2540,90 cw(c2460,90) 2460,10 775,10 cw(c775,110) 675,110 675,230 675,295 cw(c770,295) 770,390 ccw(c770,441.26) 821.26,441.26 821.26,490 cw(c871.26,490) 871.26,540 930,540 ccw(c930,560) 950,560 950,690 950,1820 ccw(c860,1820) 860,1910 150,1910 cw(c150,2010) 50,2010 50,2726.26 50,4150 cw(c150,4150) 150,4250 200,4250 250,4250 ccw(c250,4350) 350,4350 350,4520 350,4560 cw(c400,4560) 400,4610
GND on BottomLayer "GND" (solid, remove dead copper, pour order 9): 350,4610 2430,4610 cw(c2430,4510) 2530,4510 2530,4430 2530,4360 ccw(c2630,4360) 2630,4260 2750,4260 2810,4260 cw(c2810,4210) 2860,4210 2860,460 cw(c2790,460) 2790,390 2600,390 ccw(c2600,330) 2540,330 2540,90 cw(c2460,90) 2460,10 775,10 cw(c775,110) 675,110 675,230 675,295 cw(c770,295) 770,390 ccw(c770,441.26) 821.26,441.26 821.26,490 cw(c871.26,490) 871.26,540 930,540 ccw(c930,560) 950,560 950,690 950,1820 ccw(c860,1820) 860,1910 150,1910 cw(c150,2010) 50,2010 50,2726.26 50,4150 cw(c150,4150) 150,4250 200,4250 250,4250 ccw(c250,4350) 350,4350 350,4520 350,4560 cw(c400,4560) 400,4610

## Keep-outs
KeepOutLayer:
  lines w10: 0,118.11 ccw(c118.11,118.11) 118.11,0 ; 0,4527.56 cw(c118.11,4527.56) 118.11,4645.67 ; 255.51,349.58 ccw(c177.17,236.22) 258.84,347.2 ; 255.51,4522.81 ccw(c177.17,4409.45) 258.84,4520.43 ; 1515.34,2436.36 ccw(c1437,2323) 1518.68,2433.98 ; 2755.91,0 ccw(c2755.91,118.11) 2874.02,118.11 ; 2755.91,4645.67 cw(c2755.91,4527.56) 2874.02,4527.56 ; 2775.19,349.58 ccw(c2696.85,236.22) 2778.53,347.2 ; 2775.19,4522.81 ccw(c2696.85,4409.45) 2778.53,4520.43 ; 0,0 2874.02,0 ; 0,0 0,4645.67 ; 0,0 0,4645.67 ; 0,0 2874.02,0 ; 0,4645.67 2874.02,4645.67 ; 0,4645.67 2874.02,4645.67 ; 2874.02,0 2874.02,4645.67 ; 2874.02,0 2874.02,4645.67

## Other copper
TopLayer:
  text ".Legend" at 2950,-10 h100

## Silkscreen, mask and mechanical layers (free items; w line width, h text height)
TopOverlay:
  rectangle: 2521.62,4180 2696.62,4220
  rectangle: 2559.12,4200 2659.12,4300
  rectangle: 2559.12,4060 2659.12,4113.95
  rectangle: 2521.62,4040 2696.62,4080
  rectangle: 1962.5,2600 2137.5,2640
  rectangle: 2000,2620 2100,2720
  rectangle: 2000,2480 2100,2533.95
  rectangle: 1962.5,2460 2137.5,2500
  rectangle: 352.5,90 527.5,130
  rectangle: 390,110 490,163.95
  rectangle: 390,250 490,350
  rectangle: 352.5,230 527.5,270
  lines w10: 934.53,138.15 698.31,138.15 698.31,374.37 934.53,374.37 ; 934.53,138.15 934.53,138.15 ; 934.53,138.15 934.53,374.37 ; 934.53,374.37 934.53,374.37 ; 1228.31,138.14 1228.31,374.36 1464.53,374.36 1464.53,138.14 1228.31,138.14 ; 1756.29,138.14 1756.29,374.36 1992.51,374.36 1992.51,138.14 1756.29,138.14 ; 2283.31,137.77 2283.31,373.99 2519.53,373.99 2519.53,137.77 2283.31,137.77
  text "电压" at 2710,4190 h100
  text "B" at 521.81,4080 h59.06
  text "A" at 740,4080 h59.06
  text "电流" at 2711.3,4040 h100
  text "5V" at 2010.05,4031.04 h59.06
  text "B" at 2420.86,4031.04 h59.06
  text "12V" at 1900,4030 h59.06
  text "GND" at 2090,4030 h59.06
  text "A" at 2345.17,4030 h59.06
  text "5V" at 1157.55,4025.65 h59.06
  text "12V" at 1047.5,4024.61 h59.06
  text "GND" at 1237.5,4024.61 h59.06
  text "AO电压" at 2230,3960 h100
  text "电流切" at 2235,3880 h100
  text "换按键" at 2233.45,3800 h100
  text "R" at 2705.59,2890 h59.06 r270
  text "T" at 2705.59,2810 h59.06 r270
  text "G" at 2706.57,2730 h59.06 r270
  text "有源" at 2150,2621.81 h100
  text "无源" at 2160,2470 h100
  text "DI有源无源输入切换按键" at 1650,2380 h100
  text "电压" at 540,260 h100
  text "电流" at 540,113.95 h100
  text "AI电压电流输入切换按键" at 1187.06,44.79 h100
BottomOverlay:
  text "CL_MODEULE-V1.1" at 1992.51,1210 h120
Mechanical1:
  lines w10: 0,118.11 ccw(c118.11,118.11) 118.11,0 ; 0,4527.56 cw(c118.11,4527.56) 118.11,4645.67 ; 210.74,284.8 ccw(c177.17,236.22) 212.17,283.78 ; 210.74,4458.03 ccw(c177.17,4409.45) 212.17,4457.01 ; 1469.53,2370.07 ccw(c1437,2323) 1470.92,2369.08 ; 2730.43,284.8 ccw(c2696.85,236.22) 2731.86,283.78 ; 2730.43,4458.03 ccw(c2696.85,4409.45) 2731.86,4457.01 ; 2755.91,0 ccw(c2755.91,118.11) 2874.02,118.11 ; 2755.91,4645.67 cw(c2755.91,4527.56) 2874.02,4527.56 ; 0,0 2874.02,0 ; 0,0 0,4645.67 ; 0,0 0,4645.67 ; 0,0 2874.02,0 ; 0,4645.67 2874.02,4645.67 ; 0,4645.67 2874.02,4645.67 ; 2874.02,0 2874.02,4645.67 ; 2874.02,0 2874.02,4645.67
  text "PCB名称: CL_MODEULE_V1.1" at -1433.71,4537.83 h78.74
  text "尺寸： 11.8CM*7.3CM" at -1433.6,4399.92 h78.74
  text "板材：  FR4" at -1433.6,4260.99 h78.74
  text "板子层数：  2" at -1433.6,4122.86 h78.74
  text "板子厚度：  1.6" at -1433.6,3983.69 h78.74
  text "阻焊颜色：  蓝色" at -1433.71,3845.45 h78.74
  text "铜箔厚度：  h/hoz" at -1433.71,3706.28 h78.74
  text "阻焊覆盖：  过孔盖油" at -1433.71,3567.47 h78.74
  text "字符颜色：  白色" at -1433.6,3429.33 h78.74
  text "焊盘喷镀：  有铅喷锡" at -1433.6,3290.28 h78.74

## Text inside footprints (layer, text, board x,y; h text height)
C10: TopOverlay "+" at 1935,1412.84 h78.74 r90
C20AO1: TopOverlay "+" at 2169.37,3083.11 h78.74 r270
C20AO2: TopOverlay "+" at 1379.37,3083.11 h78.74 r270
P2: BottomOverlay "+" at 2548.43,623.98 h78.74 r90; BottomOverlay "-" at 2556.3,1096.42 h78.74 r90; BottomOverlay "mi" at 2775.99,1013.31 h78.74 r270; BottomOverlay "ck" at 2776.75,919.3 h78.74 r270; BottomOverlay "nc" at 2776.75,725.65 h78.74 r270; BottomOverlay "mo" at 2776.75,601.51 h78.74 r270; BottomOverlay "re" at 2776.75,832.82 h78.74 r270